# Altium PCB PCB1.PcbDoc
Units mil, origin at the board's own origin, x right, y up, seen from the top; angles counter-clockwise.
Board outline 2525 x 1415 mil, 2 copper layers (Top Layer, Bottom Layer); 11 components, 17 nets, 72 pads, 1 vias.
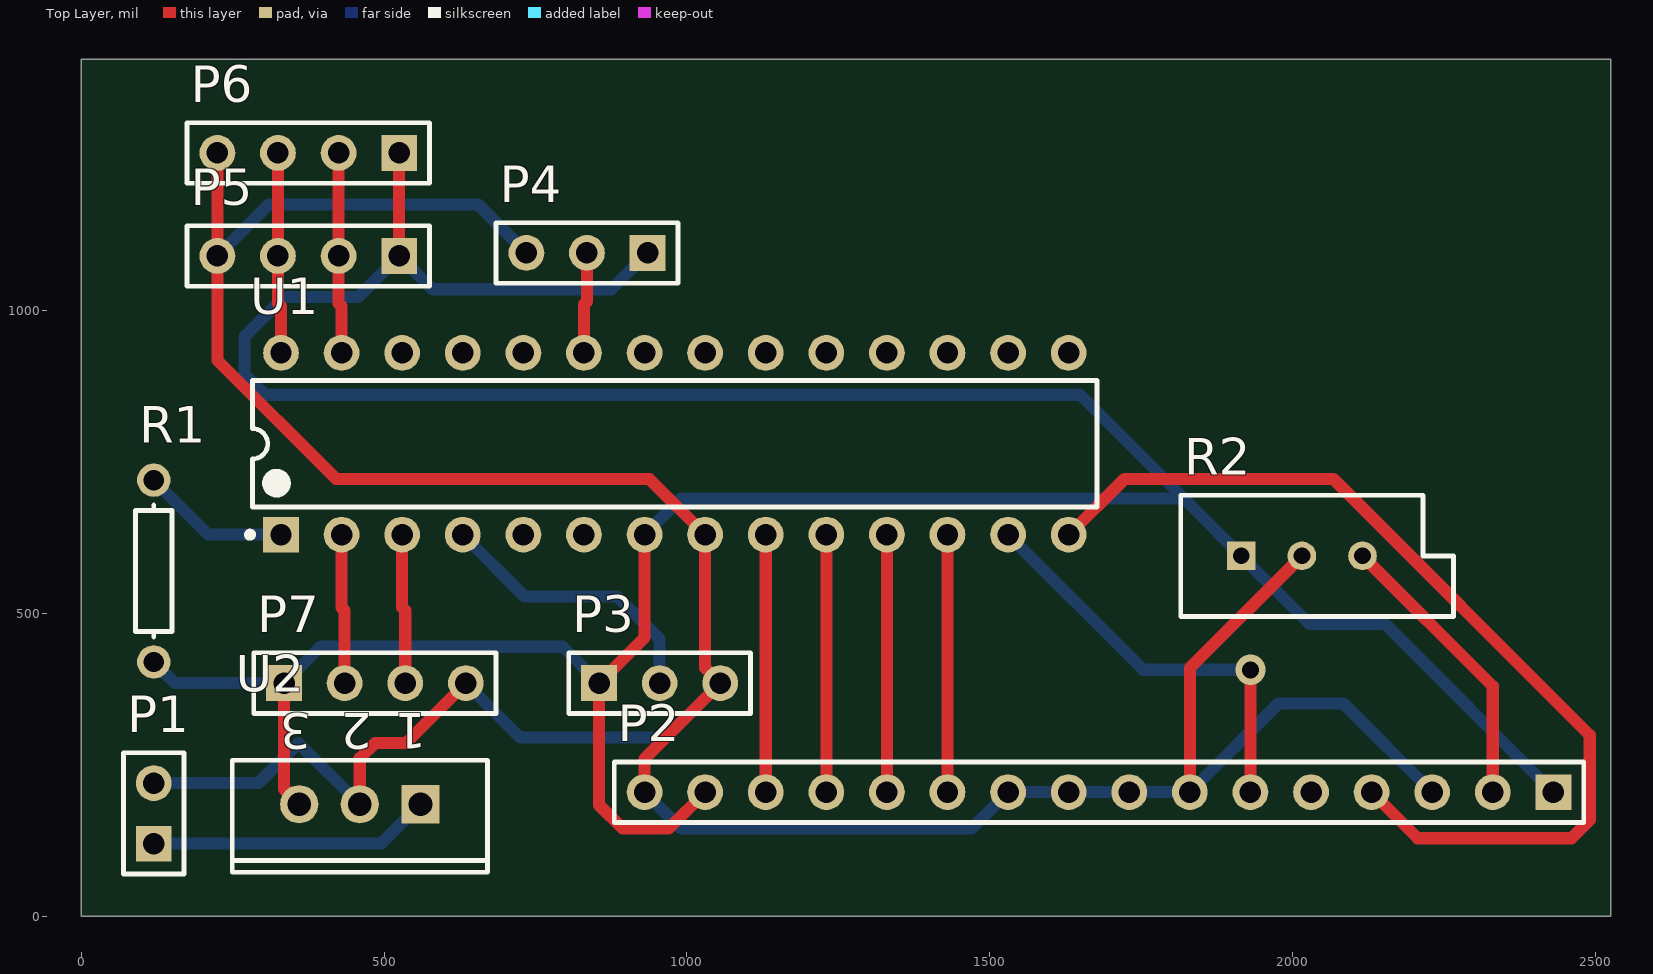
[diagram p0: Top Layer view]
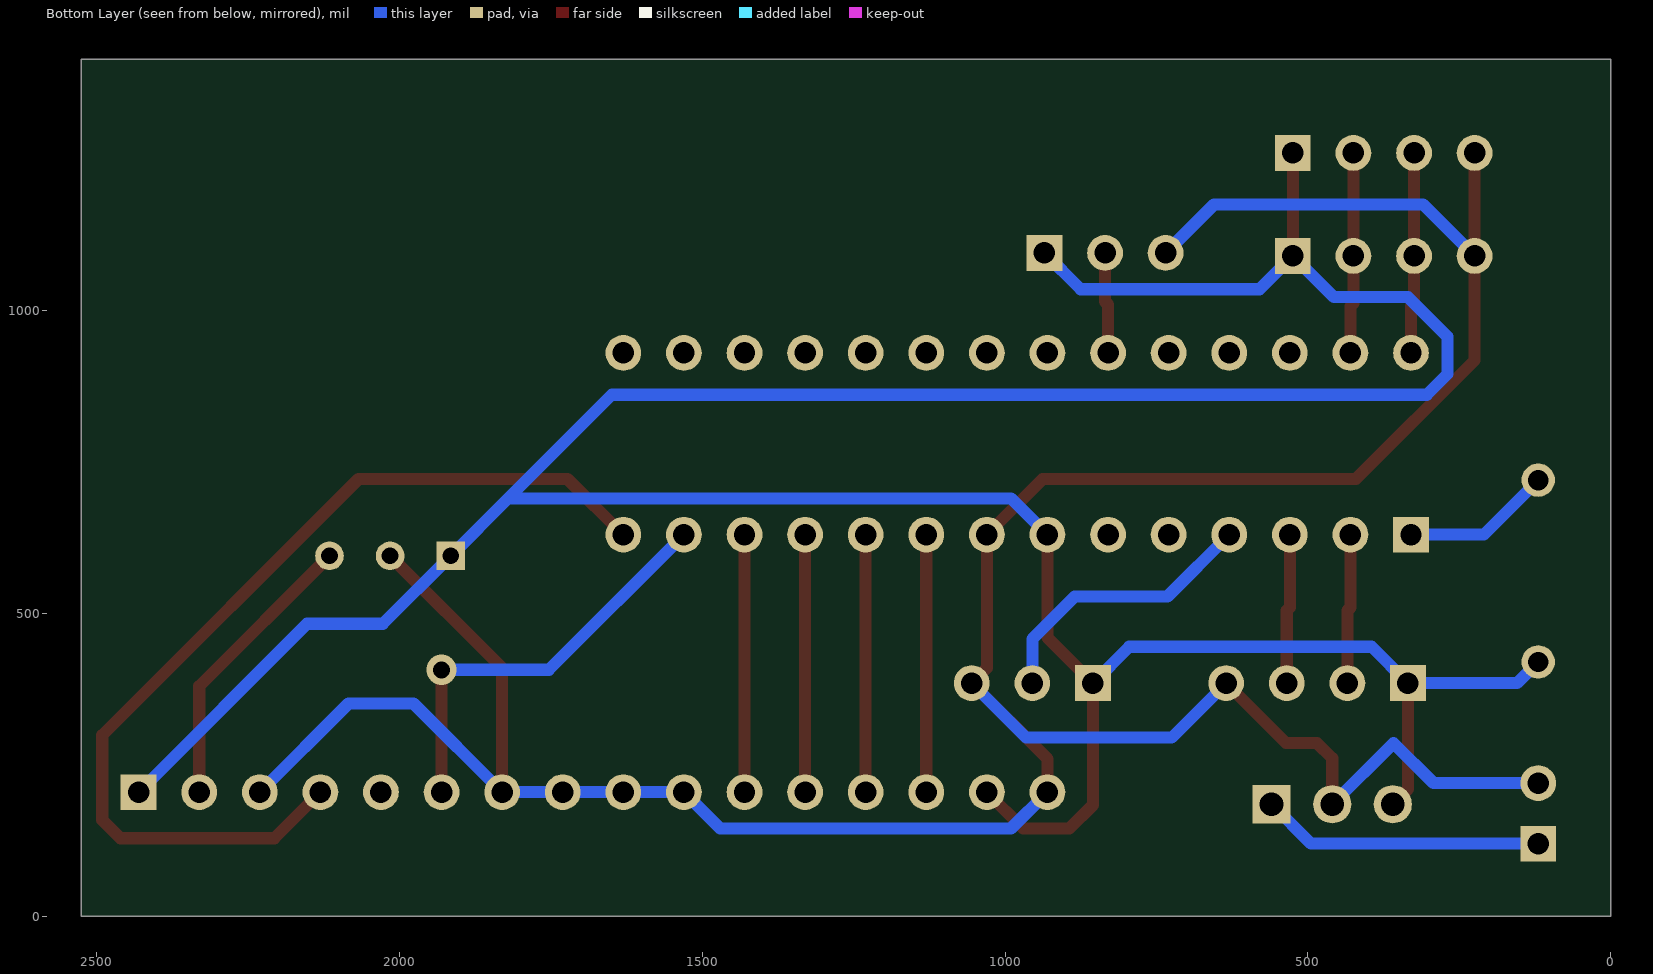
[diagram p1: Bottom Layer view, seen from below]

## Layer stack, top to bottom
Top Solder: solder mask 0.4, Solder Resist, Dk 3.5
Top Layer: signal copper 1.4
Dielectric 1: dielectric 12.6, FR-4, Dk 4.8
Bottom Layer: signal copper 1.4
Bottom Solder: solder mask 0.4, Solder Resist, Dk 3.5

## Board outline
0,1415 0,0 110,0 2525,0 2525,5 2525,1415 2485,1415

## Design rules (kind name [scope] priority, off if disabled: settings)
Clearance [All] p1: gap=20
PolygonConnect [All] p1: connectstyle=Relief reliefconductorwidth=10 reliefentries=4 polygonreliefangle="90 Angle" airgapwidth=10
RoomDefinition Sheet1 [InComponentClass('Sheet1')] p1: confinementstyle=ConfineIn formatcopy=TRUE lockcomponents=FALSE outline 0,0 2525,0 2525,1415 0,1415
RoutingVias [All] p1: holewidth=28 width=50 viastyle="Through Hole" minholewidth=28 minwidth=50 maxholewidth=28 maxwidth=50
SolderMaskExpansion [All] p1: expansion=4
UnpouredPolygon [All] p1: allowunpoured=FALSE
Width [All] p1: maxlimit=20 minlimit=20 preferedwidth=20 minimp=50.000000 maximp=50.000000 favimp=50.000000
29 further rules are at their usual default settings.

## Components (designator, comment, footprint, x,y, rotation, side; value= is the part's Value field where it differs from the comment)
P1 "Header 2" HDR1X2 120,120 r90 top
P2 "Header 16" HDR1X16 2430,205 r180 top
P3 "Header 3" HDR1X3 855,385 r0 top
P4 "Header 3" HDR1X3 935,1095 r180 top
P5 "Header 4" HDR1X4 525,1090 r180 top
P6 "Header 4" HDR1X4 525,1260 r180 top
P7 "Header 4" HDR1X4 335,385 r0 top
R1 "Res1" AXIAL-0.3 120,570 r270 top
R2 "RPot" VR5 2015,595 r0 top
U1 "ATmega328P-PU" 28P3 980,780 r90 top
U2 "µA7805CKC" KC03 460,185 r180 top

## Footprints (in the part's own frame and the unit in brackets; to place one, negate y for a bottom-side part, rotate by r counter-clockwise, add the part's x,y. Pads: shape width x height; smd on the part's side, far side on the other; paste and mask are expansions set on the pad)
28P3 [mm] "DIP, 28-Leads, Row Spacing 7.62mm, Pitch 2.54mm, Body 34.67x7.3mm"
  rect 1.5x1.5 hole 0.9: 1(-3.81,16.51)
  round 1.5 hole 0.9: 2(-3.81,13.97) 3(-3.81,11.43) 4(-3.81,8.89) 5(-3.81,6.35) 6(-3.81,3.81) 7(-3.81,1.27) 8(-3.81,-1.27) 9(-3.81,-3.81) 10(-3.81,-6.35) 11(-3.81,-8.89) 12(-3.81,-11.43) 13(-3.81,-13.97) 14(-3.81,-16.51) 15(3.81,-16.51) 16(3.81,-13.97) 17(3.81,-11.43) 18(3.81,-8.89) 19(3.81,-6.35) 20(3.81,-3.81) 21(3.81,-1.27) 22(3.81,1.27) 23(3.81,3.81) 24(3.81,6.35) 25(3.81,8.89) 26(3.81,11.43) 27(3.81,13.97) 28(3.81,16.51)
  silkscreen extent -3.93,-17.7 2.65,17.93, body extent -3.6,-17.65 3.6,17.65, height 4.58
AXIAL-0.3 [mm] "Axial Device, Thru-Hole; 2 Leads; 0.3 in Pin Spacing"
  round 1.4 hole 0.85: 1(-3.81,0) 2(3.81,0)
  silkscreen extent -2.77,-0.76 2.77,0.76
HDR1X2 [mm] "Connector; Header; 2 Position"
  rect 1.5x1.5 hole 0.9: 1(0,0)
  round 1.5 hole 0.9: 2(2.54,0)
  silkscreen extent -1.27,-1.27 3.81,1.27
HDR1X3 [mm] "Connector; Header; 3 Position"
  rect 1.5x1.5 hole 0.9: 1(0,0)
  round 1.5 hole 0.9: 2(2.54,0) 3(5.08,0)
  silkscreen extent -1.27,-1.27 6.35,1.27
HDR1X4 [mm] "Connector; Header; 4 Position"
  rect 1.5x1.5 hole 0.9: 1(0,0)
  round 1.5 hole 0.9: 2(2.54,0) 3(5.08,0) 4(7.62,0)
  silkscreen extent -1.27,-1.27 8.89,1.27
HDR1X16 [mm] "Connector; Header; 16 Position"
  rect 1.5x1.5 hole 0.9: 1(0,0)
  round 1.5 hole 0.9: 2(2.54,0) 3(5.08,0) 4(7.62,0) 5(10.16,0) 6(12.7,0) 7(15.24,0) 8(17.78,0) 9(20.32,0) 10(22.86,0) 11(25.4,0) 12(27.94,0) 13(30.48,0) 14(33.02,0) 15(35.56,0) 16(38.1,0)
  silkscreen extent -1.27,-1.27 39.37,1.27
KC03 [mm] "TO, Thru-Hole, Vertical, Heatsink Mounted; 3 In-Line Leads; Pitch 2.54 mm"
  rect 1.6x1.6 hole 1: 1(-2.54,0)
  round 1.6 hole 1: 2(0,0) 3(2.54,0)
  silkscreen extent -5.35,-1.85 5.35,2.85
VR5 [mm] "Thru-Hole; 3 Leads"
  rect 1.2x1.2 hole 0.7: 1(-2.54,0)
  round 1.2 hole 0.7: 2(0,0) 3(2.54,0)
  silkscreen extent -5.08,-2.54 6.35,2.54

## Part data
P1: "Header, 2-Pin"
P2: "Header, 16-Pin"
P3 P4: "Header, 3-Pin"
P5 P6 P7: "Header, 4-Pin"
R1: "Resistor"
R2: "Potentiometer"
U1: "8-bit AVR Microcontroller, 32KB Flash, 1KB EEPROM, 2KB SRAM, 28-pin PDIP, Industrial Grade (-40°C to 85°C)"
U2: "Positive-Voltage Regulator"

## Via types
v1: diameter 50, hole 28, Top Layer to Bottom Layer, 1 vias

## Nets (pads, with @x,y where several pads share a name; then routed paths per layer and width w, separated by ;. In a path a pad name is that pad's centre, name@x,y a point inside that pad or via, vN(x,y) a via of type N, cw(c..) or ccw(c..) an arc to the next point about the centre after c; other vN are vias at no path point)
GND: P1.2 P2.3 P2.7 P2.8 P2.9 P2.10 P2.16 P3.3 P4.3 P5.4 P6.4 P7.4 R2.2 U1.8 U2.2 | length 5475.4
  Top Layer w20: P6.4 P5.4 225,918 421,722 938,722 U1.8 1030,410 P3.3 930,260 P2.16 ; U2.2 460,261 485,286 536,286 P7.4 ; P2.7 1830,410 R2.2
  Bottom Layer w20: P1.2 293,220 359,286 U2.2 ; P5.4 310,1175 655,1175 P4.3 ; P7.4 725,295 965,295 P3.3 ; P2.16 990,145 1470,145 P2.10 P2.9 P2.8 P2.7 1976.27,351.26 2083.74,351.26 P2.3
NetP1_1: P1.1 U2.1 | length 466.9
  Bottom Layer w20: P1.1 495,120 U2.1
NetP2_2: P2.2 R2.3 | length 479.1
  Top Layer w20: R2.3 2330,380 P2.2
NetP2_4: P2.4 U1.14 | length 1617.2
  Top Layer w20: U1.14 1722,722 2067,722 2490,299 2490,159 2460,129 2206,129 P2.4
NetP2_6: P2.6 U1.13 | length 694.4
  Top Layer w20: P2.6 v1(1930,407)
  Bottom Layer w20: U1.13 1753,407 v1(1930,407)
NetP2_11: P2.11 U1.12 | length 425
  Top Layer w20: P2.11 U1.12
NetP2_12: P2.12 U1.11 | length 425
  Top Layer w20: P2.12 U1.11
NetP2_13: P2.13 U1.10 | length 425
  Top Layer w20: P2.13 U1.10
NetP2_14: P2.14 U1.9 | length 425
  Top Layer w20: P2.14 U1.9
NetP3_2: P3.2 U1.4 | length 469.2
  Bottom Layer w20: U1.4 732,528 885,528 955,458 P3.2
NetP4_2: P4.2 U1.23 | length 167.1
  Top Layer w20: U1.23 830,1010 835,1015 P4.2
NetP5_2: P5.2 P6.2 U1.27 | length 332.1
  Top Layer w20: P6.2 P5.2 425,1012 430,1007 U1.27
NetP5_3: P5.3 P6.3 U1.28 | length 332.1
  Top Layer w20: P6.3 P5.3 325,1012 330,1007 U1.28
NetP7_2: P7.2 U1.2 | length 247.1
  Top Layer w20: U1.2 430,510 435,505 P7.2
NetP7_3: P7.3 U1.3 | length 247.1
  Top Layer w20: U1.3 530,510 535,505 P7.3
NetR1_1: R1.1 U1.1 | length 247.3
  Bottom Layer w20: R1.1 210,630 U1.1
VCC: P2.1 P2.15 P3.1 P4.1 P5.1 P6.1 P7.1 R1.2 R2.1 U1.7 U2.3 | length 6063
  Top Layer w20: P7.1 335,210 U2.3 ; P5.1 P6.1 ; U1.7 930,460 P3.1 855,184 894,145 970,145 P2.15
  Bottom Layer w20: R1.2 155,385 P7.1 395,445 795,445 P3.1 ; U1.7 990,690 1820,690 ; P4.1 875,1035 580,1035 P5.1 457,1022 335,1022 270,957 270,895 304,861 1649,861 1820,690 ; P2.1 2152,483 2027,483 R2.1 1820,690
pads on no net: P2.5 U1.5 U1.6 U1.15 U1.16 U1.17 U1.18 U1.19 U1.20 U1.21 U1.22 U1.24 U1.25 U1.26

## Text inside footprints (layer, text, board x,y; h text height)
U2: Top Overlay "2" at 479.69,335.59 h59.06 r180; Top Overlay "1" at 569.84,335.59 h59.06 r180; Top Overlay "3" at 379.69,335.59 h59.06 r180